# Altium PCB Sub_A_PCB.PcbDoc
Units mm, origin at the board's own origin, x right, y up, seen from the top; angles counter-clockwise.
Board outline 63.5 x 38.1 mm, 2 copper layers (Top Layer, Bottom Layer); 11 components, 4 nets, 28 pads, 4 vias.
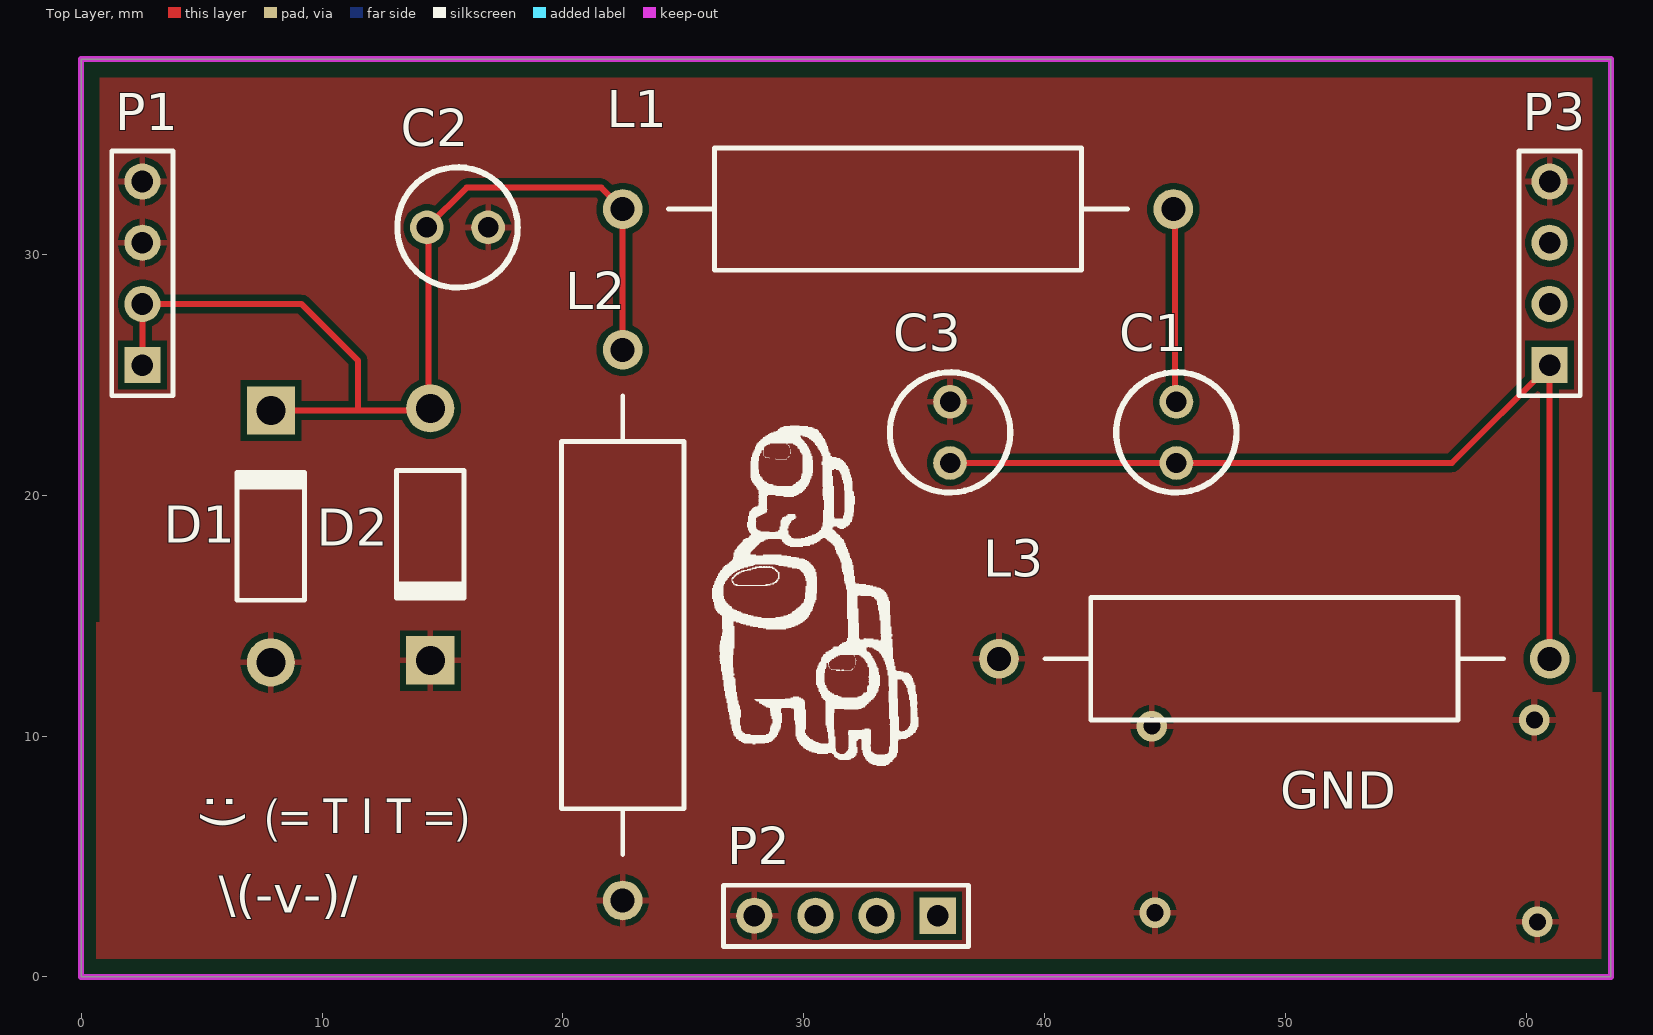
[diagram p0: Top Layer view]
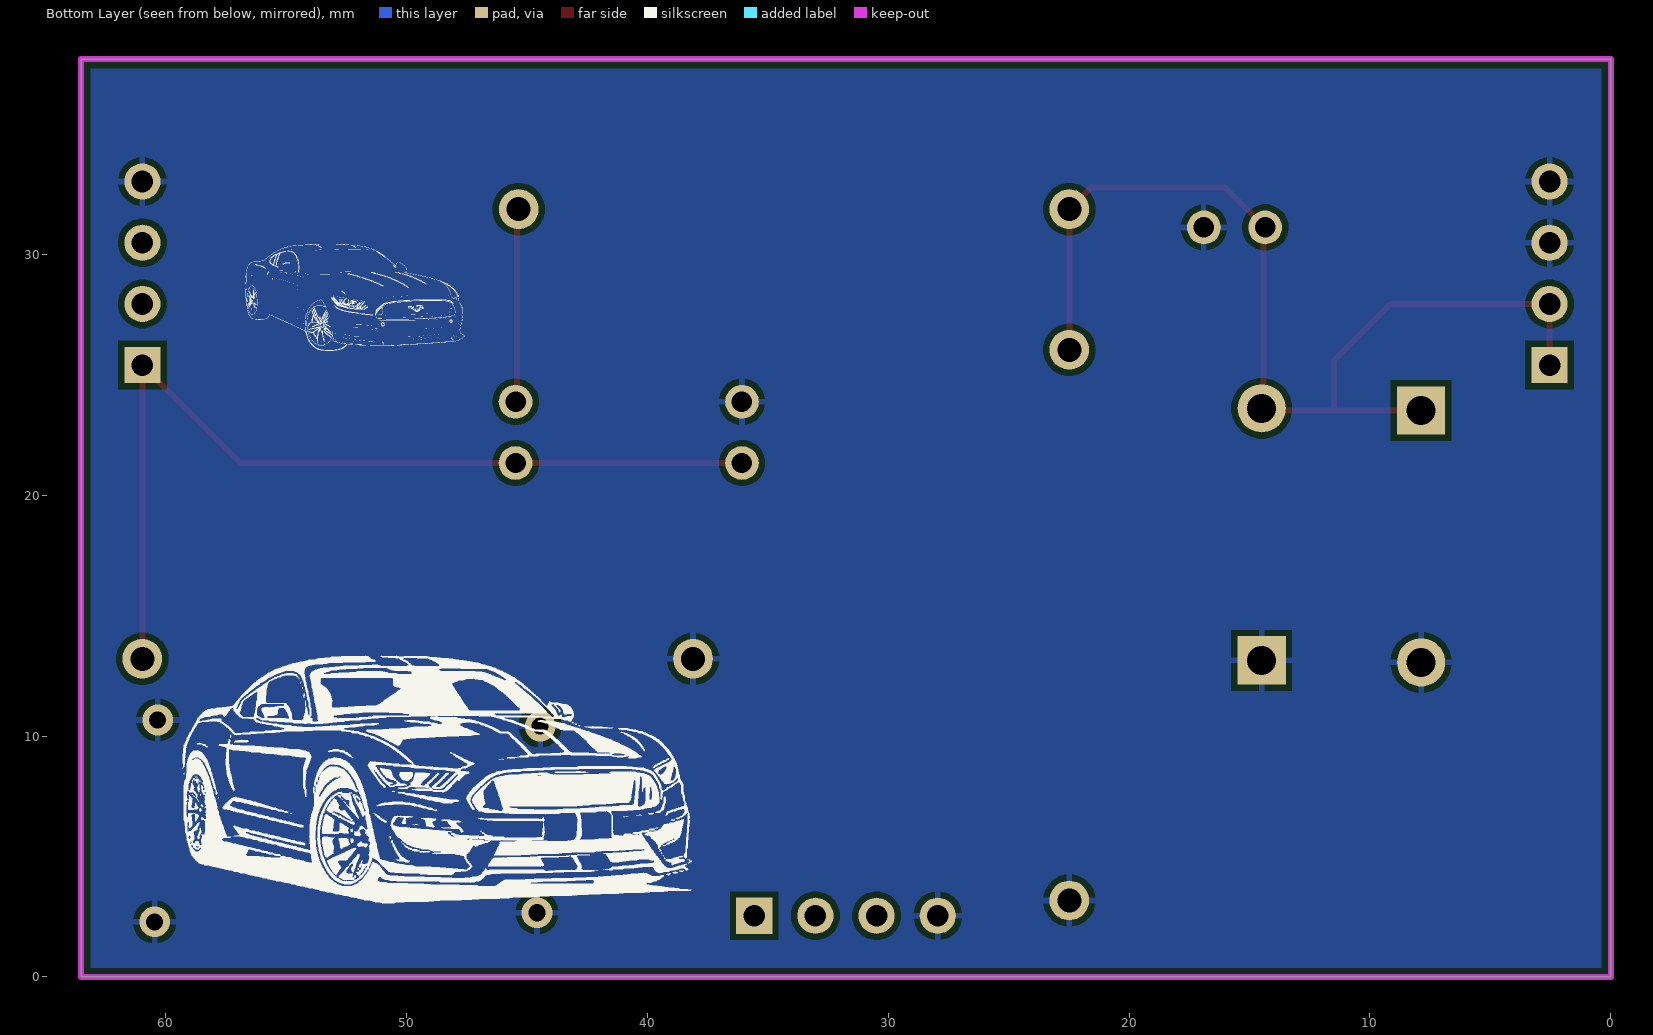
[diagram p1: Bottom Layer view, seen from below]

## Layer stack, top to bottom
Top Solder: solder mask 0.0102, Solder Resist, Dk 3.5
Top Layer: signal copper 0.0356
Dielectric 1: dielectric 0.32, FR-4, Dk 4.8
Bottom Layer: signal copper 0.0356
Bottom Solder: solder mask 0.0102, Solder Resist, Dk 3.5

## Board outline
0,0 0,38.1 63.5,38.1 63.5,0

## Design rules (kind name [scope] priority, off if disabled: settings)
Clearance [All] p1: gap=0.254 ignorepadtopadclearanceinfootprint=FALSE except(0: Arc-Hole Track-Hole SMDPad-Hole THPad-Hole Via-Hole Fill-Hole Poly-Hole Region-Hole Text-Hole)
HoleSize [All] p1: absolutevalues=TRUE maxlimit=22.86 minlimit=0.305 maxpercent=80.000 minpercent=20.000
MinimumSolderMaskSliver [All] p1: minsoldermaskwidth=0.025
PolygonConnect [All] p1: connectstyle=Relief reliefconductorwidth=0.254 reliefentries=4 polygonreliefangle="90 Angle" airgapwidth=0.254
RoutingVias [All] p1: holewidth=0.305 width=0.61 viastyle="Through Hole" minholewidth=0.305 minwidth=0.61 maxholewidth=2.54 maxwidth=5.08
SilkToSilkClearance [All] p1: silktosilkclearance=0
SilkToSolderMaskClearance [IsPad] p1: minsilkscreentomaskgap=0.025 clearancetoexposedcopper=TRUE
SolderMaskExpansion [All] p1: expansion=0.102 istentingtop=FALSE
Width [All] p1: maxlimit=5.08 minlimit=0.254 preferedwidth=0.254
26 further rules are at their usual default settings.

## Classes and differential pairs
component class Sub-A_BPF: C1 C2 C3 L1 L2 L3 P3
component class limiter: D1 D2 P1 P2

## Components (designator, comment, footprint, x,y, rotation, side; value= is the part's Value field where it differs from the comment)
C1 "Cap" RADIAL-0.1 45.466,22.606 r270 top value=100PF
C2 "Cap" RADIAL-0.1 15.621,31.115 r180 top value=330PF
C3 "Cap" RADIAL-0.1 36.068,22.606 r270 top value=330PF
D1 "Diode 1N4001" DO-41 7.874,18.288 r90 top
D2 "Diode 1N4001" DO-41 14.494,18.375 r270 top
L1 "Inductor Iron" AXIAL-0.9 33.909,31.877 r0 top value=2uH
L2 "Inductor Iron" AXIAL-0.9 22.479,14.605 r90 top value=0.47uH
L3 "Inductor Iron" AXIAL-0.9 49.53,13.208 r0 top value=0.47uH
P1 "Res1" HDR1X4 2.54,25.4 r90 top
P2 "Header 4" HDR1X4 35.56,2.54 r180 top
P3 "Header 4" HDR1X4 60.96,25.4 r90 top

## Footprints (in the part's own frame and the unit in brackets; to place one, negate y for a bottom-side part, rotate by r counter-clockwise, add the part's x,y. Pads: shape width x height; smd on the part's side, far side on the other; paste and mask are expansions set on the pad)
AXIAL-0.9 [mm] "Axial Device, Thru-Hole; 2 Leads; 0.9 in Pin Spacing"
  round 1.65 hole 1: 1(-11.43,0) 2(11.43,0)
  silkscreen extent -9.53,-2.54 9.53,2.54
DO-41 [mm] "Diode, Axial; Body 5.2 x 2.7 mm (LxDia. max), Lead Dia. 0.86 mm (max)"
  round 2 hole 1.2: 1(-5.23,0)
  rect 2x2 hole 1.2: 2(5.23,0)
  silkscreen extent -2.65,-1.4 2.75,1.4
HDR1X4 [mm] "Connector; Header; 4 Position"
  rect 1.5x1.5 hole 0.9: 1(0,0)
  round 1.5 hole 0.9: 2(2.54,0) 3(5.08,0) 4(7.62,0)
  silkscreen extent -1.27,-1.27 8.89,1.27
RADIAL-0.1 [mm] "Axial Device, Thru-Hole; 2 Leads; 0.3 in Pin Spacing"
  round 1.4 hole 0.85: 1(-1.27,0) 2(1.27,0)
  silkscreen extent -2.5,-2.5 2.5,2.5

## Part data
C1: library part "CAP CER 100PF 50V C0G/NP0 RADIAL", "Capacitor", Manufacturer Part Number=K101K15C0GF53L2, Voltage Rating=50V, LatestRevisionDate=17-Jul-2002, LatestRevisionNote="Re-released for DXP Platform.", Published=8-Jun-2000, Publisher="Altium Limited"
C2 C3: library part "CAP CER 330PF 50V X7R RADIAL", "Capacitor", Manufacturer Part Number=K331K15X7RF53L2, Voltage Rating=50V, LatestRevisionDate=17-Jul-2002, LatestRevisionNote="Re-released for DXP Platform.", Published=8-Jun-2000, Publisher="Altium Limited"
D1 D2: "1 Amp General Purpose Rectifier", Code_JEDEC=DO-204-AL, ComponentLink1Description="Manufacturer Link", ComponentLink1URL=http://www.fairchildsemi.com/, ComponentLink2Description=Datasheet, ComponentLink2URL=http://www.fairchildsemi.com/ds/1N%2F1N4001.pdf, DatasheetVersion=1998, LatestRevisionDate=17-Jul-2002, LatestRevisionNote="Re-released for DXP Platform.", PackageDescription="Diode, Axial; Body 5.2 x 2.7 mm (LxDia. max), Lead Dia. 0.86 mm (max)", PackageReference=DO-41, PackageVersion=Aug-1999, Published=8-Jun-2000, Publisher="Altium Limited"
L1: "VHF-CHOKE                 2uH      4A", Case/Package=Axial, Current Rating=4A, DC Resistance (DCR)=20mR, Inductance=2uH, Inductance Tolerance=20%, Manufacturer="TDK EPCOS", Manufacturer Part Number=B82132A5402M, Max Operating Temperature=125°C, Min Operating Temperature=-55°C, Package Quantity=2000, Resistor Type=Wirewound, Self Resonant Frequency=186MHz, Supplier Part Number 1=8807152P, Test Frequency=1MHz, Category="Fixed Inductors", ComponentLink1Description=https://datasheet.ciiva.com/3077/01950197-3077074.pdf?src-supplier=Avnet, ComponentLink1URL=https://datasheet.ciiva.com/3077/01950197-3077074.pdf?src-supplier=Avnet, Core Material=Ferrite, DC Current=4A, Diameter=5.5mm, Height=19mm, LatestRevisionDate=17-Jul-2002, LatestRevisionNote="Re-released for DXP Platform.", Lead/Base Style=Axial, Length=0.787inch, Max DC Current=4A, Military Standard=Not, Mount="Through Hole", PackageDescription="Axial Device, Thru-Hole; 2 Leads; 0.9 in Pin Spacing", PackageReference=AXIAL-0.9, Packaging="Tape and Reel", Pricing 1="5=1.76700, 50=1.55200, 125=1.36100, 250=1.27000, 4000=1.20000 (USD)", Published=24-Mar-1999, Publisher="Altium Limited", Q Factor=0.02, REACH SVHC="No SVHC", RoHS=Yes, Series=B82132, Shielding=Unshielded, Stock 1=1, Supplier 1=RSComponents, Termination=Axial, Tolerance=20%
L2 L3: "Fixed Ind 470NH 5A 27 Mohm Th", Manufacturer="TDK EPCOS", Manufacturer Part Number=B78108E1471M009, Supplier Part Number 1=495-76024-1-ND, Category="Fixed Inductors", LatestRevisionDate=17-Jul-2002, LatestRevisionNote="Re-released for DXP Platform.", PackageDescription="Axial Device, Thru-Hole; 2 Leads; 0.9 in Pin Spacing", PackageReference=AXIAL-0.9, Pricing 1="1=0.46000, 10=0.40500, 25=0.35440, 50=0.30400, 100=0.27860, 250=0.25328, 500=0.23808, 1000=0.18236 (USD)", Published=24-Mar-1999, Publisher="Altium Limited", RoHS=Yes, RoHS Compliant=Yes, Stock 1=2681, Supplier 1=Digi-Key
P1: library part "Header 4", "Header, 4-Pin", LatestRevisionDate=17-Jul-2002, LatestRevisionNote="Re-released for DXP Platform.", Publisher="Altium Limited"
P2 P3: "Header, 4-Pin", LatestRevisionDate=17-Jul-2002, LatestRevisionNote="Re-released for DXP Platform.", Publisher="Altium Limited"

## Via types
v1: diameter 1.27, hole 0.711, Top Layer to Bottom Layer, tented both sides, 3 vias
v2: diameter 1.27/1.27 (per signal layer), hole 0.711, Top Layer to Bottom Layer, tented both sides, 1 vias

## Nets (pads, with @x,y where several pads share a name; then routed paths per layer and width w, separated by ;. In a path a pad name is that pad's centre, name@x,y a point inside that pad or via, vN(x,y) a via of type N, cw(c..) or ccw(c..) an arc to the next point about the centre after c; other vN are vias at no path point)
GND: C2.1 C3.1 D1.1 D2.2 L2.1 L3.1 P1.3 P1.4 P2.4 P3.4
  other v1: 60.452,2.286 44.45,10.414 60.325,10.668
  other v2: 44.577,2.667
IF_SIG: C1.2 C3.2 L3.2 P3.1 | length 38.8
  Top Layer w0.254: C3.2 C1.2 56.896,21.336 P3.1 L3.2
LIM_OUT: C2.2 D1.2 D2.1 L1.1 L2.2 P1.1 P1.2 | length 43.6
  Top Layer w0.254: P1.1 P1.2 9.144,27.94 11.493,25.591 11.493,23.667 ; D1.2 11.344,23.518 14.407,23.518 D2.1 14.423,23.677 14.423,31.043 C2.2 16.002,32.766 21.59,32.766 L1.1 L2.2
NetC1_1: C1.1 L1.2 | length 8.1
  Top Layer w0.254: L1.2 45.402,31.813 45.402,23.939 C1.1
pads on no net: P2.1 P2.2 P2.3 P3.2 P3.3

## Polygon pours and split planes (outlines as drawn)
GND on Bottom Layer "GND_L02_P000" (solid, remove dead copper, pour order 0): 0.127,37.973 63.373,37.973 63.373,0.254 63.5,0.127 0,0.127
GND on Top Layer "GND_L01_P003" (solid, pour order 3): 27.559,37.338 27.559,11.176 62.738,11.176 62.738,37.338
GND on Top Layer "GND_L01_P001" (solid, pour order 1): 0.762,37.338 0.762,14.399 28.067,14.399 28.067,37.592 28.067,37.338
GND on Top Layer "GND_L01_P008" (solid, pour order 8): 48.636,0.762 48.636,6.35 57.282,6.35 57.282,0.762
GND on Top Layer "GND_L01_P007" (solid, remove dead copper, pour order 7): 41.148,11.811 63.119,11.811 63.119,0.762 41.148,0.762
GND on Top Layer "GND_L01_P002" (solid, pour order 2): 0.631,14.732 41.275,14.732 41.275,2.159 41.275,0.762 38.862,0.762 0.631,0.762

## Keep-outs
Keep-Out Layer:
  the board outline again, w0.254

## Silkscreen, mask and mechanical layers (free items; w line width, h text height)
Top Overlay:
  drawing of 10 lines, arcs and shapes, not listed
  text ":)" at 5.207,7.62 h1.52 r270
  text "GND" at 49.784,6.985 h1.52
  text "(=ＴIＴ=)" at 7.62,5.969 h1.52
  text "\(-v-)/" at 5.715,2.667 h1.52
Bottom Overlay:
  drawing of 467 lines, arcs and shapes, not listed
Top Solder:
  region: 48.133,0.762 48.133,6.096 56.388,6.096 56.388,0.762